# Altium PCB Board_v1_p1.PcbDoc
Units mm, origin at the board's own origin, x right, y up, seen from the top; angles counter-clockwise.
Board outline 33 x 33 mm, 4 copper layers (Top Layer, Layer 1, Layer 2, Bottom Layer), stack 0.904 mm thick; 35 components, 41 nets, 168 pads, 37 vias.
Unrouted connection lines stored in the file: 2.
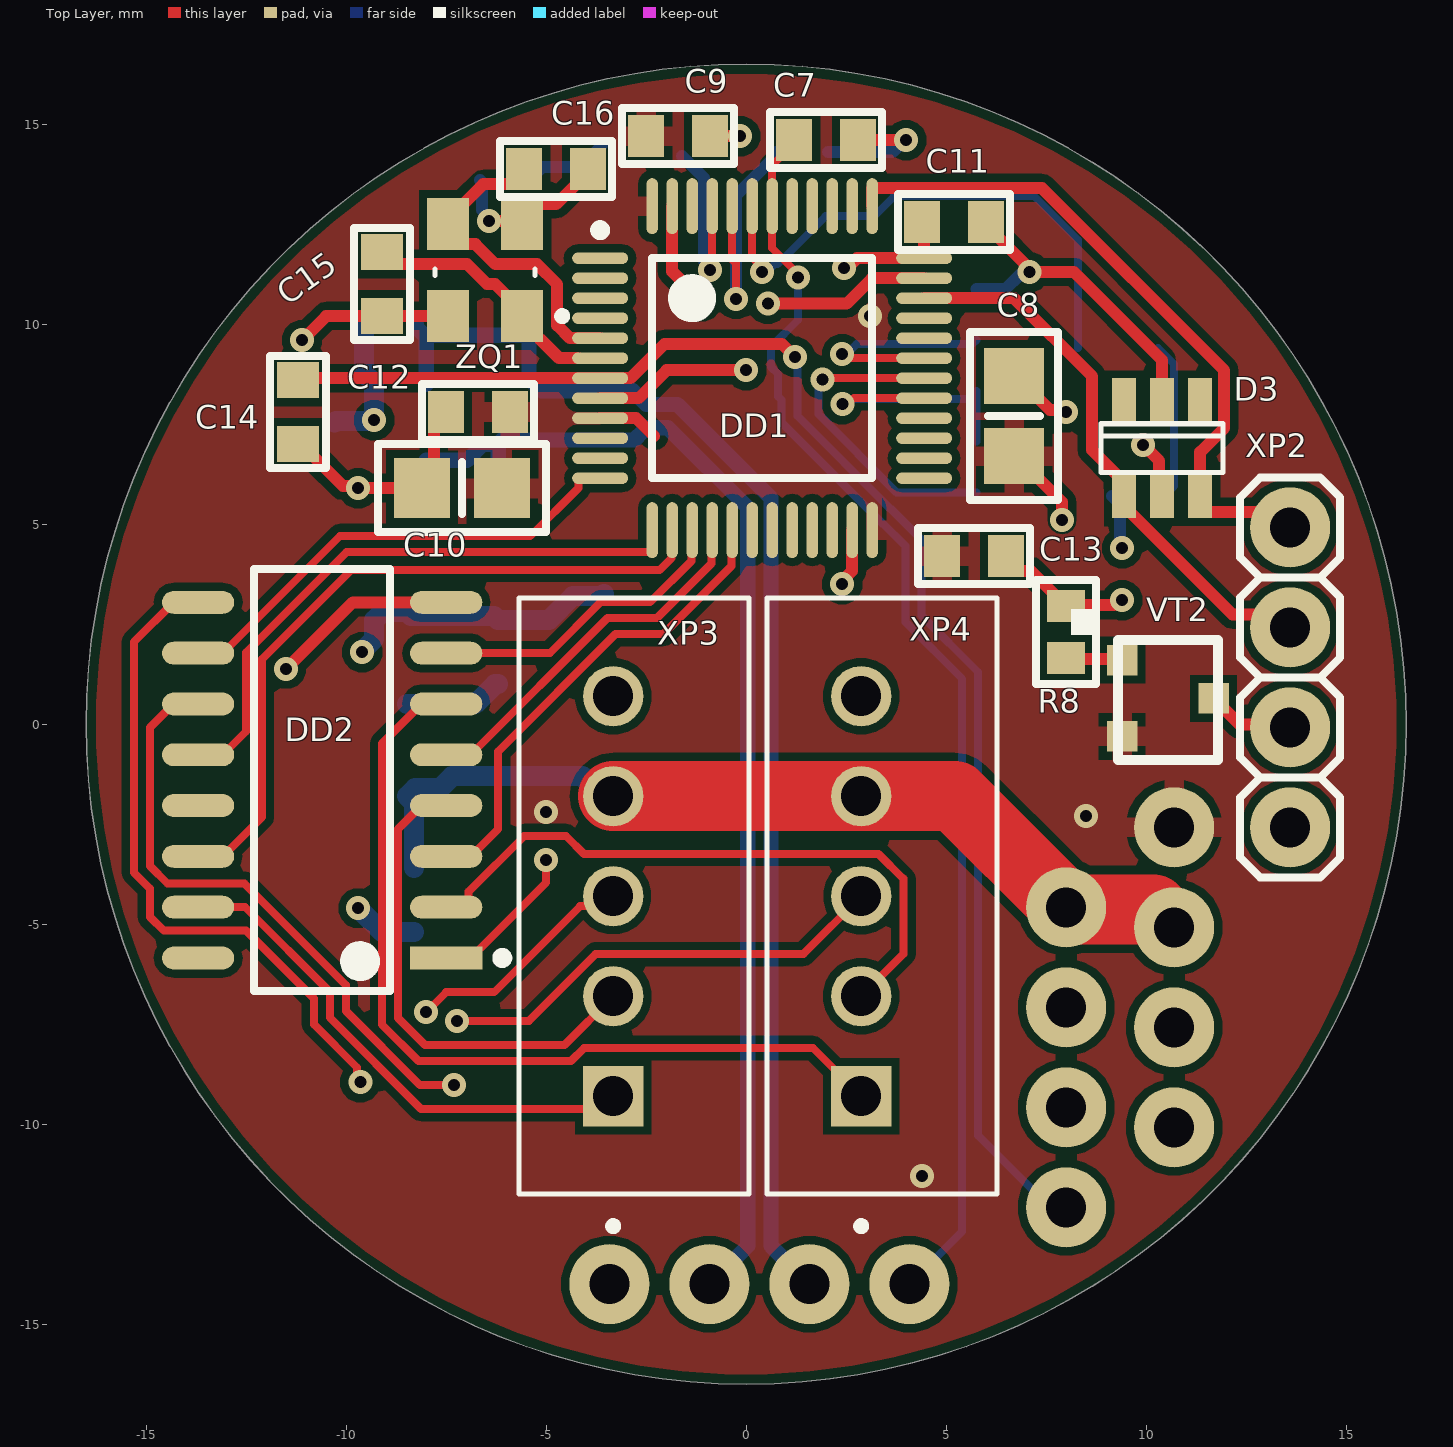
[diagram p0: Top Layer view]
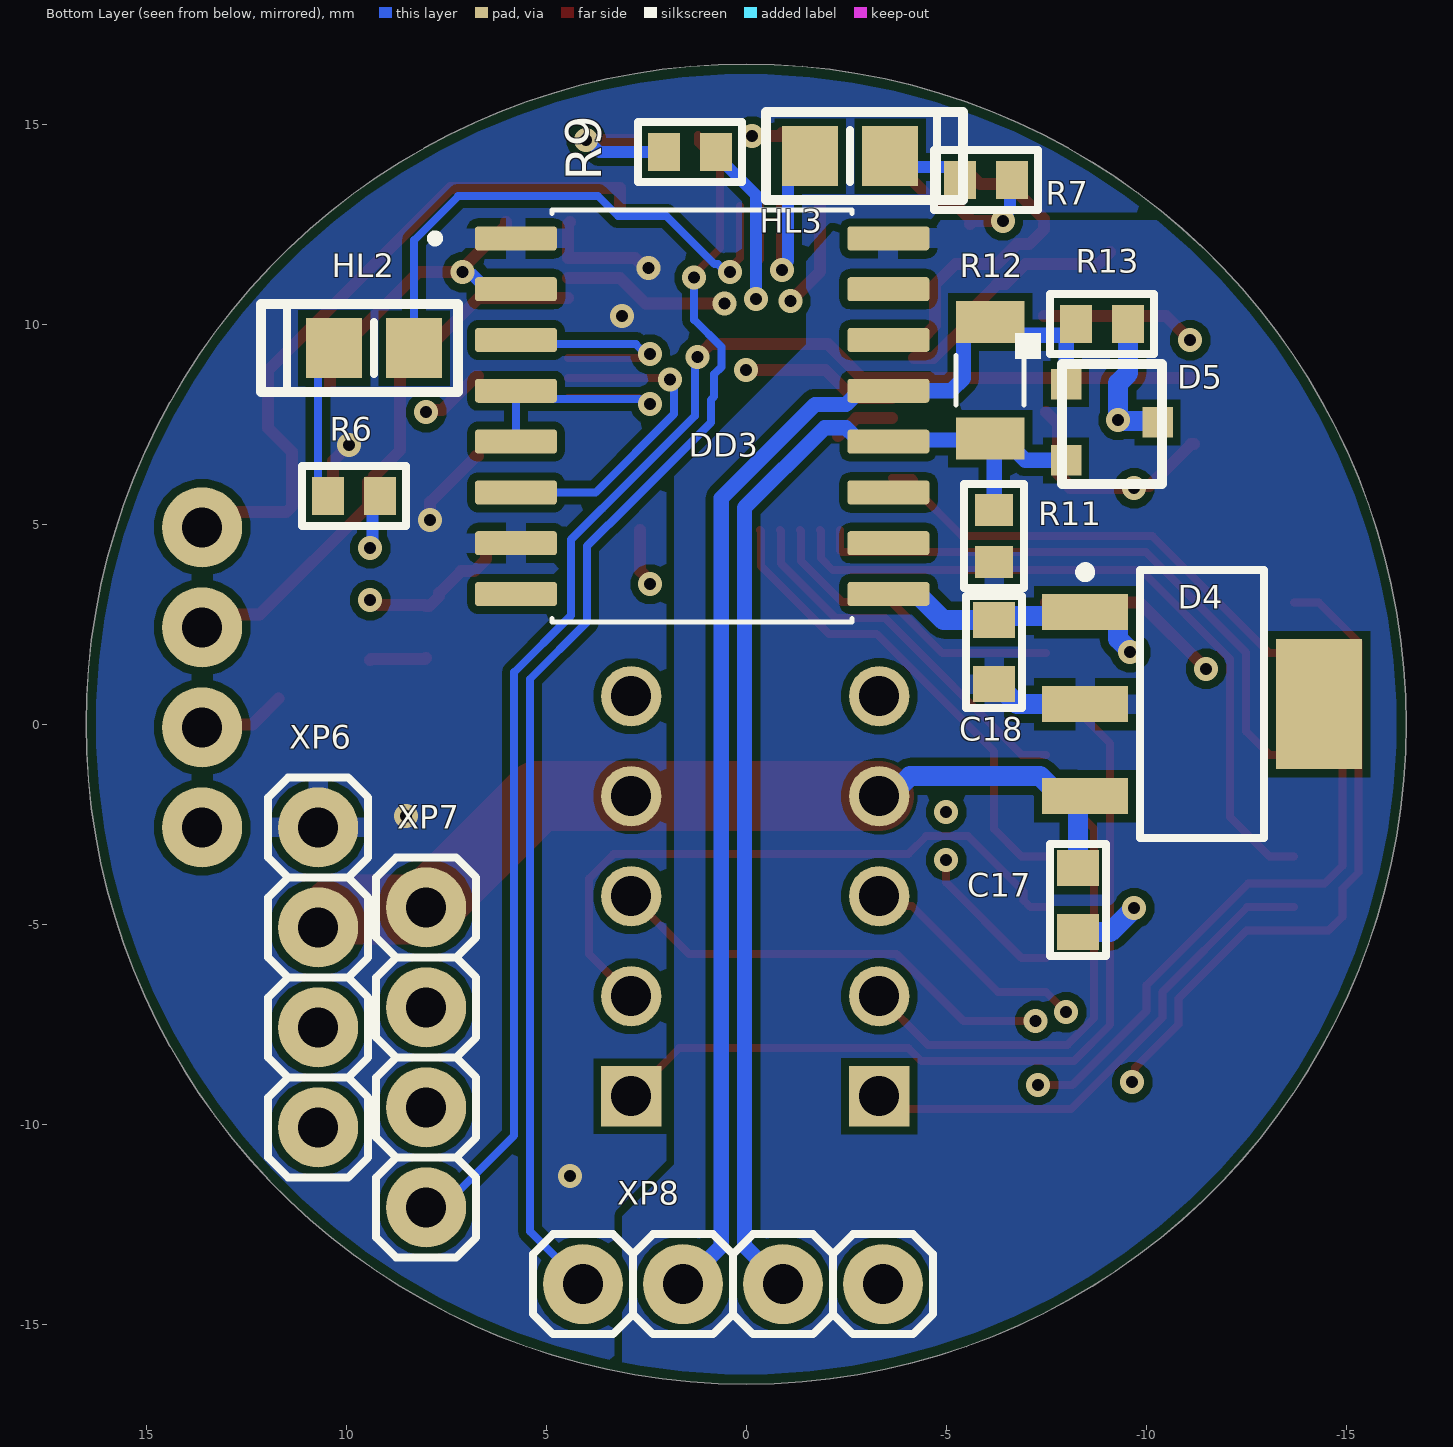
[diagram p1: Bottom Layer view, seen from below]
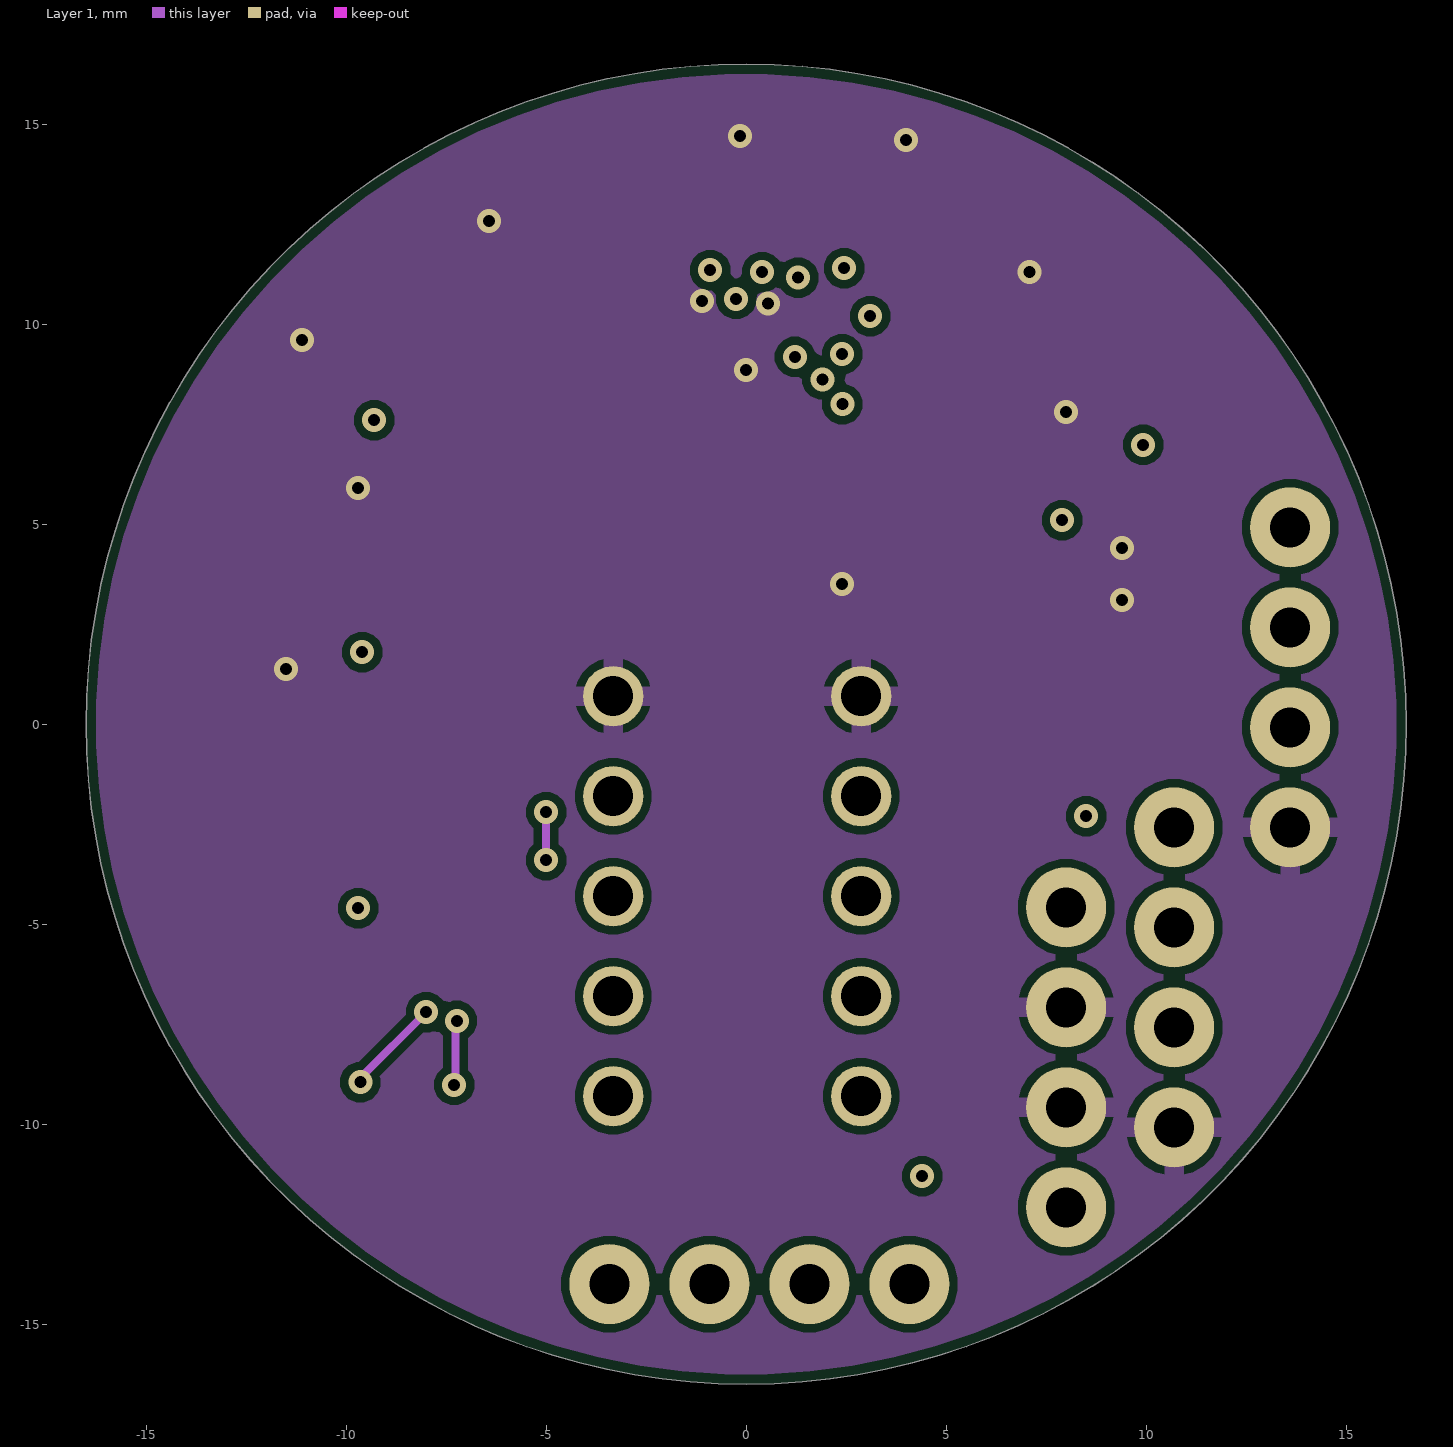
[diagram p2: Layer 1]
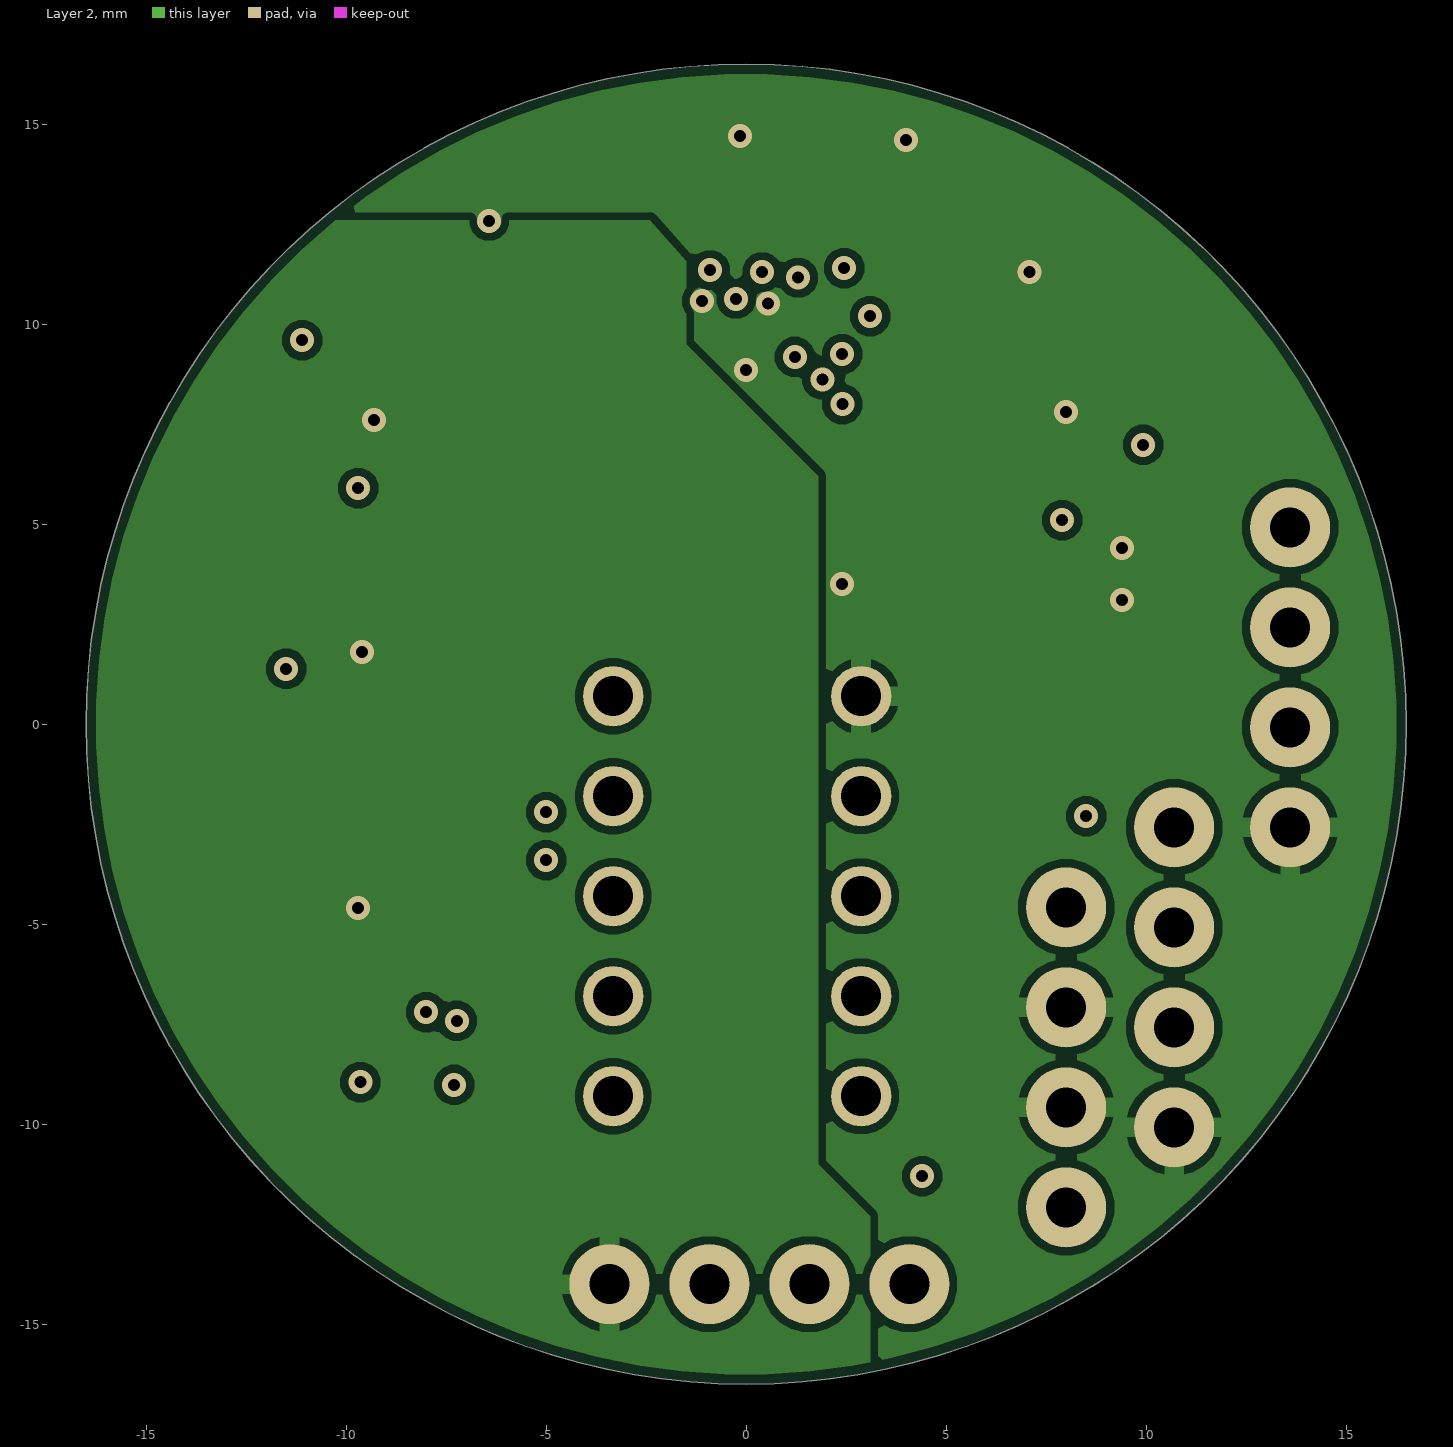
[diagram p3: Layer 2]

## Layer stack, top to bottom
Top Solder: solder mask 0.0254, SM-001, Dk 4
Top Layer: signal copper 0.035
Dielectric 2: prepreg 0.127, FR4, Dk 4.2
Layer 1: signal copper 0.035
Dielectric 1: core 0.51, FR4, Dk 4.6
Layer 2: signal copper 0.035
Dielectric 3: prepreg 0.127, FR4, Dk 4.2
Bottom Layer: signal copper 0.035
Bottom Solder: solder mask 0.0254, SM-001, Dk 4

## Board outline
0,-16.501 cw(c0,0) -16.501,0 cw(c0,0) 0,16.501 cw(c0,0) 16.501,0 cw(c0,0)

## Design rules (kind name [scope] priority, off if disabled: settings)
AcuteAngle [All] p1: minimum=3.50000000000000E+0001 checktracksonly=FALSE
BoardOutlineClearance "BoardOutlineClearance 1" [All] p1: gap=0.25 ignorepadtopadclearanceinfootprint=FALSE except(0: Arc-SplitContinuation Track-SplitContinuation SMDPad-SplitContinuation THPad-SplitContinuation Via-SplitContinuation Fill-SplitContinuation Poly-SplitContinuation Region-SplitContinuation Text-SplitContinuation) // Milling
BoardOutlineClearance "BoardOutlineClearance 2" [All] p2: gap=0.4 ignorepadtopadclearanceinfootprint=FALSE except(0: Arc-SplitContinuation Track-SplitContinuation SMDPad-SplitContinuation THPad-SplitContinuation Via-SplitContinuation Fill-SplitContinuation Poly-SplitContinuation Region-SplitContinuation Text-SplitContinuation) // V-Cut
Clearance "Clearance 3 Oz" [All] p1 off: gap=0.35 ignorepadtopadclearanceinfootprint=FALSE except(0.25: Arc-Hole Track-Hole SMDPad-Hole THPad-Hole Via-Hole Fill-Hole Poly-Hole Region-Hole Text-Hole)
Clearance "Clearance 2 Oz" [All] p2 off: gap=0.3 ignorepadtopadclearanceinfootprint=FALSE except(0.25: Arc-Hole Track-Hole SMDPad-Hole THPad-Hole Via-Hole Fill-Hole Poly-Hole Region-Hole Text-Hole)
Clearance "Clearance-1 1 Oz" [All] p3: gap=0.2 ignorepadtopadclearanceinfootprint=FALSE except(0.25: Arc-Hole Track-Hole SMDPad-Hole THPad-Hole Via-Hole Fill-Hole Poly-Hole Region-Hole Text-Hole) // Standart
Clearance "Clearance-2 1 Oz" [All] p4 off: gap=0.15 ignorepadtopadclearanceinfootprint=FALSE except(0.2: Arc-Fill Arc-Poly Track-Fill Track-Poly SMDPad-Fill SMDPad-Poly THPad-Fill THPad-Poly Via-Fill Via-Poly Fill-Fill Fill-Poly Poly-Poly; 0.25: Arc-Hole Track-Hole SMDPad-Hole THPad-Hole Via-Hole Fill-Hole Poly-Hole Region-Hole Text-Hole) // Advance
Clearance "Clearance-1 1/2 Oz" [All] p5 off: gap=0.125 ignorepadtopadclearanceinfootprint=FALSE except(0.2: Arc-Fill Arc-Poly Track-Fill Track-Poly SMDPad-SMDPad SMDPad-Fill SMDPad-Poly THPad-Fill THPad-Poly Via-Fill Via-Poly Fill-Fill Fill-Poly Poly-Poly Poly-Region Poly-Text; 0.25: Arc-Hole Track-Hole SMDPad-Hole THPad-Hole Via-Hole Fill-Hole Poly-Hole Region-Hole Text-Hole) // Standart
Clearance "Clearance-2 1/2 Oz" [All] p6 off: gap=0.1 ignorepadtopadclearanceinfootprint=FALSE except(0.15: Arc-Fill Arc-Poly Track-Fill Track-Poly SMDPad-SMDPad SMDPad-Fill SMDPad-Poly THPad-Fill THPad-Poly Via-Fill Via-Poly Fill-Fill Fill-Poly Poly-Poly Poly-Region Poly-Text; 0.25: Arc-Hole Track-Hole SMDPad-Hole THPad-Hole Via-Hole Fill-Hole Poly-Hole Region-Hole Text-Hole) // Advance
DiffPairsRouting "DiffPairsRouting 1 Oz" [All] p1: maxlimit=0.25 minlimit=0.2 mostfreqgap=0.2 toplayer_minwidth=0.3 toplayer_maxwidth=0.4 toplayer_prefwidth=0.4 midlayer1_minwidth=0.3 midlayer1_maxwidth=0.4 midlayer1_prefwidth=0.4 midlayer2_minwidth=0.3 midlayer2_maxwidth=0.4 midlayer2_prefwidth=0.4 bottomlayer_minwidth=0.3 bottomlayer_maxwidth=0.4 bottomlayer_prefwidth=0.4 maxuncoupledlength=12.7
DiffPairsRouting "DiffPairsRouting 1/2 Oz" [All] p2 off: maxlimit=0.254 minlimit=0.1 mostfreqgap=0.254 toplayer_minwidth=0.1 toplayer_maxwidth=0.381 toplayer_prefwidth=0.381 midlayer1_minwidth=0.1 midlayer1_maxwidth=0.381 midlayer1_prefwidth=0.381 midlayer2_minwidth=0.1 midlayer2_maxwidth=0.381 midlayer2_prefwidth=0.381 bottomlayer_minwidth=0.1 bottomlayer_maxwidth=0.381 bottomlayer_prefwidth=0.381 maxuncoupledlength=12.7
HoleSize "Minimum HoleSize" [IsPad] p1: absolutevalues=TRUE maxlimit=5.9 minlimit=0.6 maxpercent=80.000 minpercent=20.000
HoleSize "Minimum HoleSize VIA 1" [IsVia] p2: absolutevalues=TRUE maxlimit=5.9 minlimit=0.3 maxpercent=80.000 minpercent=20.000 // Standart
HoleSize "Minimum HoleSize VIA 2" [IsVia] p3: absolutevalues=TRUE maxlimit=5.9 minlimit=0.2 maxpercent=80.000 minpercent=20.000 // Advance
HoleToHoleClearance Hole2HoleClearance [All] p1: gap=0.25 allowstackedmicrovias=FALSE
MinimumAnnularRing "Minimum AR VIA Standart" [IsVia] p1: minimumring=0.15
MinimumAnnularRing "Minimum AR PAD Standart" [IsPAD] p2: minimumring=0.2
MinimumAnnularRing "Minimum AR VIA Advance" [IsVia] p3: minimumring=0.1
MinimumAnnularRing "Minimum AR PAD Advance" [IsPAD] p4: minimumring=0.15
MinimumSolderMaskSliver "SolderMask Bridge Standart" [All] p1: minsoldermaskwidth=0.15 // All Masks
MinimumSolderMaskSliver "SolderMask Bridge Advance" [All] p2: minsoldermaskwidth=0.1 // Mask LDI
PlaneClearance "PlaneClearance 3 Oz" [All] p1: clearance=0.35
PlaneClearance "PlaneClearance 2 Oz" [All] p2: clearance=0.3
PlaneClearance "PlaneClearance 1 Oz" [All] p3: clearance=0.2
PlaneClearance "PlaneClearance-1 1/2 Oz" [All] p4: clearance=0.2 // Standart
PlaneClearance "PlaneClearance-2 1/2 Oz" [All] p5: clearance=0.15 // Advance
PlaneConnect "TermalConnect 3 Oz" [All] p1: planeconnectstyle=Relief reliefexpansion=0.2 reliefentries=4 reliefconductorwidth=0.35 reliefairgap=0.35 // Standart
PlaneConnect "TermalConnect 2 Oz" [All] p2: planeconnectstyle=Relief reliefexpansion=0.2 reliefentries=4 reliefconductorwidth=0.3 reliefairgap=0.3 // Standart
PlaneConnect "TermalConnect-1 1 Oz" [All] p3: planeconnectstyle=Relief reliefexpansion=0.2 reliefentries=4 reliefconductorwidth=0.2 reliefairgap=0.2 // Standart
PlaneConnect "TermalConnect-2 1 Oz" [All] p4: pad.planeconnectstyle=Relief pad.reliefexpansion=0.15 pad.reliefentries=4 pad.reliefconductorwidth=0.2 pad.reliefairgap=0.2 via.planeconnectstyle=Direct via.reliefexpansion=0.15 via.reliefentries=4 via.reliefconductorwidth=0.15 via.reliefairgap=0.15 // Advance
PlaneConnect "TermalConnect-1 1/2 Oz" [All] p5: planeconnectstyle=Relief reliefexpansion=0.2 reliefentries=4 reliefconductorwidth=0.2 reliefairgap=0.2 // Standart
PlaneConnect "TermalConnect-2 1/2 Oz" [All] p6: pad.planeconnectstyle=Relief pad.reliefexpansion=0.15 pad.reliefentries=4 pad.reliefconductorwidth=0.15 pad.reliefairgap=0.15 via.planeconnectstyle=Direct via.reliefexpansion=0.15 via.reliefentries=4 via.reliefconductorwidth=0.15 via.reliefairgap=0.15 // Advance
PolygonConnect "PolygonConnect 3 Oz" [All] p1 off: thpad.connectstyle=Relief thpad.reliefconductorwidth=0.35 thpad.reliefentries=4 thpad.polygonreliefangle="90 Angle" thpad.airgapwidth=0.35 smdpad.connectstyle=Relief smdpad.reliefconductorwidth=0.35 smdpad.reliefentries=4 smdpad.polygonreliefangle="90 Angle" smdpad.airgapwidth=0.35 via.connectstyle=Direct via.reliefconductorwidth=0.254 via.reliefentries=4 via.polygonreliefangle="90 Angle" via.airgapwidth=0.254
PolygonConnect "PolygonConnect 2 Oz" [All] p2 off: thpad.connectstyle=Relief thpad.reliefconductorwidth=0.3 thpad.reliefentries=4 thpad.polygonreliefangle="90 Angle" thpad.airgapwidth=0.3 smdpad.connectstyle=Relief smdpad.reliefconductorwidth=0.3 smdpad.reliefentries=4 smdpad.polygonreliefangle="90 Angle" smdpad.airgapwidth=0.3 via.connectstyle=Direct via.reliefconductorwidth=0.254 via.reliefentries=4 via.polygonreliefangle="90 Angle" via.airgapwidth=0.254
PolygonConnect "PolygonConnect-1 1 Oz" [All] p3: thpad.connectstyle=Relief thpad.reliefconductorwidth=0.5 thpad.reliefentries=4 thpad.polygonreliefangle="90 Angle" thpad.airgapwidth=0.2 smdpad.connectstyle=Relief smdpad.reliefconductorwidth=0.5 smdpad.reliefentries=4 smdpad.polygonreliefangle="90 Angle" smdpad.airgapwidth=0.2 via.connectstyle=Direct via.reliefconductorwidth=0.254 via.reliefentries=4 via.polygonreliefangle="90 Angle" via.airgapwidth=0.254 // Standart
PolygonConnect "PolygonConnect-2 1 Oz" [All] p4 off: thpad.connectstyle=Relief thpad.reliefconductorwidth=0.15 thpad.reliefentries=4 thpad.polygonreliefangle="90 Angle" thpad.airgapwidth=0.15 smdpad.connectstyle=Relief smdpad.reliefconductorwidth=0.15 smdpad.reliefentries=4 smdpad.polygonreliefangle="90 Angle" smdpad.airgapwidth=0.15 via.connectstyle=Direct via.reliefconductorwidth=0.254 via.reliefentries=4 via.polygonreliefangle="90 Angle" via.airgapwidth=0.254 // Advance
PolygonConnect "PolygonConnect-1 1/2 Oz" [All] p5 off: thpad.connectstyle=Relief thpad.reliefconductorwidth=0.15 thpad.reliefentries=4 thpad.polygonreliefangle="90 Angle" thpad.airgapwidth=0.2 smdpad.connectstyle=Relief smdpad.reliefconductorwidth=0.2 smdpad.reliefentries=4 smdpad.polygonreliefangle="90 Angle" smdpad.airgapwidth=0.2 via.connectstyle=Direct via.reliefconductorwidth=0.254 via.reliefentries=4 via.polygonreliefangle="90 Angle" via.airgapwidth=0.254 // Standart
PolygonConnect "PolygonConnect-2 1/2 Oz" [All] p6 off: thpad.connectstyle=Relief thpad.reliefconductorwidth=0.125 thpad.reliefentries=4 thpad.polygonreliefangle="90 Angle" thpad.airgapwidth=0.15 smdpad.connectstyle=Relief smdpad.reliefconductorwidth=0.125 smdpad.reliefentries=4 smdpad.polygonreliefangle="90 Angle" smdpad.airgapwidth=0.15 via.connectstyle=Direct via.reliefconductorwidth=0.254 via.reliefentries=4 via.polygonreliefangle="90 Angle" via.airgapwidth=0.254 // Advance
RoutingCorners [All] p1 off: cornerstyle=45-Degree minsetback=2.54 maxsetback=2.54
RoutingVias [All] p1: holewidth=0.3 width=0.6 viastyle="Through Hole" minholewidth=0.3 minwidth=0.6 maxholewidth=5.9 maxwidth=6.4
SilkToSilkClearance Silk2SilkClearance [All] p1 off: silktosilkclearance=0.15
SilkToSolderMaskClearance Silk2SolderMaskClearance [IsPad] p1 off: minsilkscreentomaskgap=0.15 clearancetoexposedcopper=TRUE
SolderMaskExpansion SolderMaskExpansion-1 [All] p1: expansion=0.05 istentingtop=FALSE // Standart
SolderMaskExpansion "SolderMaskExpansion LDI" [All] p2: expansion=0.025 istentingtop=FALSE // Advance
SupplyNets "Schematic Supply Nets_4" [InNet('GND_SIGNAL')] p1: voltage=0.000
SupplyNets "Schematic Supply Nets_3" [InNet('GND')] p2: voltage=0.000
SupplyNets "Schematic Supply Nets_2" [InNet('+3,3 В')] p3: voltage=0.000
SupplyNets "Schematic Supply Nets_1" [InNet('+5 В')] p4: voltage=0.000
SupplyNets "Schematic Supply Nets" [InNet('+12 В')] p5: voltage=0.000
UnRoutedNet [All] p1: checkbadconnections=TRUE
Width "Width 3 Oz" [All] p1 off: maxlimit=10 minlimit=0.35 preferedwidth=0.4 checkconnectedcopper=TRUE
Width "Width 2 Oz" [All] p2 off: maxlimit=10 minlimit=0.3 preferedwidth=0.35 minimp=50.000000 maximp=50.000000 favimp=50.000000 checkconnectedcopper=TRUE
Width "Width 1 Oz" [All] p3: maxlimit=10 minlimit=0.15 preferedwidth=0.2 checkconnectedcopper=TRUE
Width "Width 1/2 Oz" [All] p4 off: maxlimit=10 minlimit=0.1 preferedwidth=0.125 checkconnectedcopper=TRUE
20 further rules are at their usual default settings.

## Classes and differential pairs
component class RS485: C17 C18 D4 D5 DD3 R11 R12 R13
component class MC_stm32: C7 C8 C9 C10 C11 C12 C13 C14 C15 C16 D3 DD1 DD2 HL2 HL3 R6 R7 R8 R9 VT2 XP2 XP3 XP4 ZQ1 С7 С8 С14
differential pair RS485: +RS485_P -RS485_N

## Components (designator, comment, footprint, x,y, rotation, side; value= is the part's Value field where it differs from the comment)
C7 "Capacitor" 0603C 2,14.6 r0 top value="0,1 мк"
C8 "Capacitor" 0805C 6.6,7.6 r90 top value="4,7 мк"
C9 "Capacitor" 0603C -1.7,14.7 r0 top value="0,1 мк"
C10 "Capacitor" 0805C -7,5.8 r180 top value="1 мк"
C11 "Capacitor" 0603C 5.2,12.55 r180 top value="0,1 мк"
C12 "Capacitor" 0603C -6.7,7.8 r180 top value="0,01 мк"
C13 "Capacitor" 0603C 5.7,4.2 r180 top value="0,1 мк"
C14 "Capacitor" 0603C -11.2,7.8 r270 top value="0,1 мк"
C15 "Capacitor" 0603C -9.1,11 r270 top value="12 п"
C16 "Capacitor" 0603C -4.75,13.876 r0 top value="12 п"
C17 "Capacitor" 0603C -8.3,-4.4 r270 bottom value="0,1 мк"
C18 "Capacitor" 0603C -6.2,1.8 r90 bottom value="10 мк"
D3 "USBLC6-4" SOT23-6 10.4,6.9 r180 top
D4 "LD1117S50CTR" SOT223 -11.4,0.5 r180 bottom
D5 "PSM712" SOT23-3 -8,8.5 r180 bottom
DD1 "STM32F103C8T6" LQFP48 0.4,8.9 r0 top
DD2 "CD4050B" SOP-16 -10.6,-1.4 r180 top
DD3 "ADM2483BRWZ" SOIC-16W 1.1,7.7 r180 bottom
HL2 "=Value" 0805D 9.2,9.3 r0 bottom
HL3 "=Value" 0805D -2.5,14.3 r180 bottom
R6 "Resistor" 0603R 9.8,5.7 r180 bottom value=200
R7 "Resistor" 0603R -6,13.6 r0 bottom value="1 к"
R8 "Resistor" 0603R 8,2.3 r270 top value="10 к"
R9 "Resistor" 0603R 1.4,14.3 r180 bottom value="10 к"
R11 "Resistor" 0603R -6.2,4.7 r270 bottom value=680
R12 "Resistor" 1206R -6.1,8.6 r270 bottom value=120
R13 "Resistor" 0603R -8.9,10 r0 bottom value=680
VT2 "AO3401A" SOT23-3 9.4,1.6 r0 top
XP2 "PLS4" PLS4 13.6,5 r0 top
XP3 "CWF-5" CWF-5 -2.8,-4.3 r270 top
XP4 "CWF-5" CWF-5 3.4,-4.3 r270 top
XP6 "Comment" PLS4 10.7,-2.5 r180 bottom locked
XP7 "Comment" PLS4 8,-4.5 r180 bottom locked
XP8 "Comment" PLS4 -3.5,-14 r270 bottom locked
ZQ1 "XTAL_GND" QSMD3.2x2.5 -5.6,10.2 r180 top value="8 МГц"

## Footprints (in the part's own frame and the unit in brackets; to place one, negate y for a bottom-side part, rotate by r counter-clockwise, add the part's x,y. Pads: shape width x height; smd on the part's side, far side on the other; paste and mask are expansions set on the pad)
0603C [mm] "Chip Resistor, 2-Leads, Body 1,40x0,80mm, IPC Medium Density"
  rect 0.9x1.05 smd: 1(-0.8,0) 2(0.8,0)
  silkscreen extent -1.4,-0.7 1.4,0.7, body extent -0.85,-0.45 0.85,0.45, height 0.9
0603R [mm] "Chip Resistor, 2-Leads, Body 1.60x0.85mm, IPC Medium Density"
  rect 0.8x0.95 smd: 1(-0.65,0) 2(0.65,0)
  silkscreen extent -1.3,-0.75 1.3,0.75, body extent -0.87,-0.47 0.88,0.48, height 0.9
0805C [mm]
  rect 1.4x1.5 smd: 1(-0.9,-0.1) 2(1.1,-0.1)
  silkscreen extent -2,-1.2 2.2,1, body extent -0.95,-0.8 1.15,0.55, height 1.38
0805D [mm]
  rect 1.4x1.5 smd: 1(-0.9,-0.1) 2(1.1,-0.1)
  silkscreen extent -2,-1.2 2.93,1, body extent -0.97,-0.8 1.17,0.6, height 0.7
1206R [mm]
  rect 1.05x1.72 smd: 1(-1.46,0) 2(1.46,0)
  silkscreen extent -0.62,-0.85 0.62,0.85, body extent -1.55,-0.77 1.55,0.78, height 0.65
CWF-5 [mm] "B5B-XH-A"
  rect 1.508x1.508 / inner round 1.508 / far side rect 1.508x1.508 hole 1: 1(5,-0.525)
  round 1.508 hole 1: 2(2.5,-0.525) 3(0,-0.525) 4(-2.5,-0.525) 5(-5,-0.525)
  silkscreen extent -7.45,-2.88 8.35,2.88, body extent -7.45,-2.88 7.45,2.88, height 7
LQFP48 [mm] "TSQFP, 48-Leads, Body 7,00x7,00mm, Pitch 0,50mm, IPC Medium Density"
  oval 1.4x0.29 smd: 1(-4.05,2.75) 2(-4.05,2.25) 3(-4.05,1.75) 4(-4.05,1.25) 5(-4.05,0.75) 6(-4.05,0.25) 7(-4.05,-0.25) 8(-4.05,-0.75) 9(-4.05,-1.25) 10(-4.05,-1.75) 11(-4.05,-2.25) 12(-4.05,-2.75)
  oval 0.29x1.4 smd paste+0 mask+0.09: 13(-2.75,-4.05) 14(-2.25,-4.05) 15(-1.75,-4.05) 16(-1.25,-4.05) 17(-0.75,-4.05) 18(-0.25,-4.05) 19(0.25,-4.05) 20(0.75,-4.05) 21(1.25,-4.05) 22(1.75,-4.05) 23(2.25,-4.05) 24(2.75,-4.05) 37(2.75,4.05) 38(2.25,4.05) 39(1.75,4.05) 40(1.25,4.05) 41(0.75,4.05) 42(0.25,4.05) 43(-0.25,4.05) 44(-0.75,4.05) 45(-1.25,4.05) 46(-1.75,4.05) 47(-2.25,4.05) 48(-2.75,4.05)
  oval 1.4x0.29 smd paste+0 mask+0.09: 25(4.05,-2.75) 26(4.05,-2.25) 27(4.05,-1.75) 28(4.05,-1.25) 29(4.05,-0.75) 30(4.05,-0.25) 31(4.05,0.25) 32(4.05,0.75) 33(4.05,1.25) 34(4.05,1.75) 35(4.05,2.25) 36(4.05,2.75)
  silkscreen extent -4.17,-2.75 2.75,3.57, body extent -4.5,-4.47 4.5,4.52, height 1.48
PLS4 [mm]
  round 2 hole 1: 1(0,-0.08) 2(0,-2.58) 3(0,-5.08) 4(0,-7.58)
  silkscreen extent -1.25,-8.83 1.25,1.17, body extent -1.27,-8.93 1.27,1.19, height 8.44
QSMD3.2x2.5 [mm] "Кварцевый резонатор"
  rect 1.05x1.3 smd: 1(0,0) 2(1.85,-2.3) 3(0,-2.3) 3(1.85,0)
  silkscreen extent -1.1,-1.18 2.18,0.1, body extent -0.32,-2.75 2.18,0.45, height 0.8
SOIC-16W [mm]
  rrect25% 2.05x0.6 smd: 1(-4.655,4.445) 2(-4.655,3.175) 3(-4.655,1.905) 4(-4.655,0.635) 5(-4.655,-0.635) 6(-4.655,-1.905) 7(-4.655,-3.175) 8(-4.655,-4.445) 9(4.655,-4.445) 10(4.655,-3.175) 11(4.655,-1.905) 12(4.655,-0.635) 13(4.655,0.635) 14(4.655,1.905) 15(4.655,3.175) 16(4.655,4.445)
  silkscreen extent -6.78,-5.15 3.75,5.15, body extent -5.16,-5.15 5.16,5.15, height 2.65
SOP-16 [mil]
  rect 71x22.52 smd paste+0 mask+0: 1(-122.06,175)
  rrect100% 71x22.52 smd paste+0 mask+0: 2(-122.06,125) 3(-122.06,75) 4(-122.06,25) 5(-122.06,-25) 6(-122.06,-75) 7(-122.06,-125) 8(-122.06,-175) 9(122.06,-175) 10(122.06,-125) 11(122.06,-75) 12(122.06,-25) 13(122.06,25) 14(122.06,75) 15(122.06,125) 16(122.06,175)
  silkscreen extent -182,-208 67,208, body extent -167,-218 167,218, height 10
SOT23-3 [mil]
  rect 30x30 smd: 1(0,0) 2(0,-75) 3(90,-37.5)
  silkscreen extent -50,-98 94,50, body extent -4,-97 94,21, height 41
SOT23-6 [mm]
  rect 0.6x1.2 smd: 1(-0.95,-1.15) 2(0,-1.15) 3(0.95,-1.15) 4(0.95,1.15) 5(0,1.15) 6(-0.95,1.15)
  silkscreen extent -1.52,-0.61 1.52,0.61, body extent -1.46,-1.4 1.46,1.4, height 1.4
SOT223 [mm] "SOT223, ld1117"
  rect 2.15x0.9 smd: 1(-2.925,2.3) 2(-2.925,0) 3(-2.925,-2.3)
  rect 2.15x3.25 smd: 4(2.925,0)
  silkscreen extent -3.05,-3.35 1.55,3.42, body extent -3.56,-3.3 3.51,3.2, height 1.6

## Part data
C7 C9 C11 C12 C13 C14 C15 C16 C17 C18: library part "0,1 мк", "Конденсатор", Part Number=Capacitor
C8: library part "0,1 мк", "Конденсатор керамический smd 4.7 мкФ X7R 10% 16В 0805,", Part Number=Capacitor
C10: library part "0,1 мк", "Конденсатор керамический smd 1 мкФ X7R 16В 10% 0805, GRM21BR71C105K", Part Number=Capacitor
D3: "Сборка защитных диодов для USB", ComponentLink1Description=Shop, ComponentLink1URL=https://www.chipdip.ru/product0/8001780508, Part Number=USBLC6-4
D4: "Линейный стабилизатор напряжения 5 вольта. Максимальный ток - 0,8 ампер, гарантированное падение напряжения 1,3 вольта"
D5: "Защитный диод для линии RS-485", Interface=RS-485, Part Number=PSM712
DD1: "Микроконтроллер", Case=корпус, Manufacturer="ST Microelectronics", Value1=MCU, Datasheet=http://www.st.com/content/ccc/resource/technical/document/datasheet/33/d4/6f/1d/df/0b/4c/6d/CD00161566.pdf/files/CD00161566.pdf/jcr:content/translations/en.CD00161566.pdf, Notice="48 пиновая версия STM32F103", Part Number=STM32F103C8T6, Rate=-0,3...4,0В, Shop="магазин с самой дешевой ценой"
DD2: "Шесть буферных элементов", Part Number=CD4050B
DD3: "Приёмопередатчик RS-485 с гальванической развязкой"
HL2: library part LED, "Светодиод зеленый SMD 0805", Case=-, Color=Зеленый, Datasheet=-, Manufacturer=-, Notice=-, Rate=-, Shop=-
HL3: library part LED, "Светодиод зеленый SMD 0805", Case=-, Color=Красный, Datasheet=-, Manufacturer=-, Notice=-, Rate=-, Shop=-
R6 R7: "0.1Вт 0603 100 Ом, 1%, Чип резистор (SMD)"
R8: "0603 10 кОм, 1%, Чип резистор (SMD)"
R9: "0603 100 кОм, 1%, Чип резистор (SMD)"
R11 R12 R13: "Резистор", Part Number=Resistor
VT2: "P-канальный MOSFET", Part Number=AO3401A
XP2: Manufacturer=Connfly, Value1=SWCLOCK, Value2=SWDIO, Value3=+3,3_in, Value4=GND, Datasheet=https://lib.chipdip.ru/227/DOC000227157.pdf, Notice="Вилка штырьевая 4 пина, шаг 2,54мм", Rate="500В AC 1min", Shop=https://www.chipdip.ru/product/pls-4
XP3: "Разъем на плату, 3 А, 250 В, шаг 2.5 мм; CWF-5 (CONNFLY) B5B-XH-A (JST)", Manufacturer=JST, Value1=SERVO1_DIR, Value2=SERVO1_PWM, Value3=SERVO1_FB, Value4="+12 В", Value5=GND, Datasheet=https://cdn.promelec.ru/upload/items/2020/05/25/ePH-JST_.pdf, Notice="Вилка штырьевая 5 пинов, шаг 2мм", Rate="100В, 2А", Shop=https://www.promelec.ru/product/362481/
XP4: "Разъем на плату, 3 А, 250 В, шаг 2.5 мм; CWF-5 (CONNFLY) B5B-XH-A (JST)", Manufacturer=JST, Value1=SERVO2_DIR, Value2=SERVO2_PWM, Value3=SERVO2_FB, Value4="+12 В", Value5=GND, Datasheet=https://cdn.promelec.ru/upload/items/2020/05/25/ePH-JST_.pdf, Notice="Вилка штырьевая 5 пинов, шаг 2мм", Rate="100В, 2А", Shop=https://www.promelec.ru/product/362481/
ZQ1: "WTL3M85421FO, Резонатор кварцевый 8МГц, 10PPM при 25°C, 20PPM при -40°С+85°C, 400Ом, 12пФ", Part Number=XTAL_GND

## Via types
v1: diameter 0.6, hole 0.3, Top Layer to Bottom Layer, 37 vias

## Nets (pads, with @x,y where several pads share a name; then routed paths per layer and width w, separated by ;. In a path a pad name is that pad's centre, name@x,y a point inside that pad or via, vN(x,y) a via of type N, cw(c..) or ccw(c..) an arc to the next point about the centre after c; other vN are vias at no path point)
"+3,3 В": C8.1 C9.1 C10.1 C11.2 C12.1 C13.2 D3.5 DD1.9 DD1.24 DD1.36 DD1.48 DD2.1 DD3.1 DD3.7 VT2.2 XP6.1 | length 12.9
  Top Layer w0.2: DD2.1 -6.884,-5.845 -5,-3.961 v1(-5,-3.4)
  Top Layer w0.3: DD1.9 -2.75,7.65 -2.3,7.2 ; v1(2.448,11.402) 2.529,11.402 2.777,11.65 DD1.36 4.45,12.5 C11.2 ; C8.1 6.75,6.7 7.9,5.55 v1(7.9,5.1) ; v1(9.925,6.982) 10.325,6.581 10.325,6.125 D3.5@10.4,6.05
  Layer 1 w0.2: v1(-5,-3.4) v1(-5,-2.2)
  other v1: 4.4,-11.3 8.5,-2.3 3.1,10.2
"+5 В": C18.1 D4.2 DD3.16 R11.2 | length 2.5
  Bottom Layer w0.5: D4.2 -6.775,0.5 -6.275,1 C18.1
"+12 В": C17.1 D4.3 XP3.4 XP4.4 XP6.2 XP6.3 XP7.1 | length 22.8
  Top Layer w1.75: XP3.4 5.22,-1.8 8.048,-4.628 10.18,-4.628 10.632,-5.08 XP6.2
  Bottom Layer w0.5: C17.1 -8.3,-1.975 D4.3 -8.275,-1.6 -7.65,-1.6 -7.35,-1.3 -4.098,-1.3 -3.598,-1.8 XP3.4
BUTTON: C7.1 DD1.42 XP8.4 | length 32
  Top Layer w0.2: C7.1@1.2,14.725 1.2,14.525 0.65,13.975 0.65,11.899 1.3,11.249 v1(1.3,11.162)
  Bottom Layer w0.2: v1(1.3,11.162) 1.3,10.108 0.62,9.428 0.62,8.931 0.8,8.751 0.8,8.191 0.882,8.109 0.882,7.544 3.431,4.995 3.439,4.995 3.98,4.454 3.98,2.554 5.4,1.134 5.4,-12.68 XP8.4
GND: C7.2 C8.2 C9.2 C10.2 C11.1 C12.2 C13.1 C14.2 C15.2 C16.2 D3.2 DD1.8 DD1.23 DD1.35 DD1.47 DD2.8 DD3.2 R6.2 R7.1 R8.1 R9.1 XP2.4 XP3.5 XP4.5 XP6.4 XP7.2 XP7.3 ZQ1.3 | length 49.4
  Top Layer w0.3: v1(-11.499,1.381) -9.835,3.045 DD2.8 ; C14.2 -11.125,7 -10.082,5.957 -9.757,5.957 v1(-9.7,5.9) C10.2 ; v1(-11.1,9.6) -10.5,10.2 ZQ1.3@-7.45,10.2 ; C10.2@-8.1,5.95 -7.8,6.25 -7.8,7.5 C12.2 ; v1(-6.425,12.581) -5.681,12.581 ZQ1.3@-5.6,12.5 ; ZQ1.3@-5.591,12.634 -5.225,13 -4.751,13 -4.1,13.651 C16.2@-4.1,14.1 ; DD1.8 -2.688,8.15 -1.988,8.85 v1(0,8.85) ; DD1.47 -1.85,11.317 v1(-1.109,10.576) ; C9.2@-0.9,14.775 C9.2 v1(-0.15,14.7) ; v1(0.54,10.512) 2.512,10.512 3.15,11.15 DD1.35 ; v1(2.4,3.5) 2.4,3.581 2.65,3.831 DD1.23 ; C7.2 v1(4,14.6) v1@4.081,14.6 ; C11.1 6,12.475 7.032,11.443 7.032,11.439 7.17,11.3 8.2,11.3 10.4,9.1 D3.2@10.4,8.35 ; C13.1 6.5,4.125 6.8,3.825 7.125,3.825 7.675,3.275 7.675,3.2 7.925,2.95 R8.1 8.025,2.975 9.194,2.975 9.319,3.1 v1(9.4,3.1) ; C8.2 6.75,8.7 7.593,7.857 7.943,7.857 v1(8,7.8)
  Bottom Layer w0.3: R7.1 -6.6,13.55 -6.6,12.856 ; R9.1 3.664,14.3 3.964,14.6 v1(4,14.6) ; DD3.2 6.48,10.875 6.848,11.243 7.032,11.243 v1(7.089,11.3) ; R6.2 9.343,5.507 9.343,4.457 v1(9.4,4.4)
GND_SIGNAL: C17.2 C18.2 D4.1 D5.3 DD3.9 R13.1 XP8.1 | length 12.3
  Bottom Layer w0.5: D5.3 -10.253,7.581 -9.319,7.581 v1(-9.3,7.6) -9.3,8.525 -9.55,8.775 R13.1 ; v1(-9.701,-4.6) -9.101,-5.2 C17.2 ; v1(-9.6,1.8) -9.6,1.827 -9.3,2.127 -9.3,2.6 -9.1,2.8 D4.1 -8.375,2.7 -6.3,2.7 C18.2 -4.935,2.6 -4.33,3.205 -3.605,3.205 DD3.9
LED_ERROR: DD1.45 HL3.1 | length 4.7
  Top Layer w0.2: v1@-0.9,11.4 -0.85,11.45 DD1.45
  Bottom Layer w0.3: HL3.1 -1.05,13.65 -1.05,11.579 -0.9,11.429 v1(-0.9,11.348)
LED_OK: DD1.43 HL2.1 | length 13.6
  Top Layer w0.2: DD1.43 0.15,11.658 0.4,11.408 v1(0.4,11.3)
  Bottom Layer w0.2: v1(0.4,11.3) 0.508,11.3 0.708,11.5 0.789,11.5 1.989,12.7 3.2,12.7 3.7,13.2 7.2,13.2 8.3,12.1 HL2.1
NetC3_1: 
NetC3_2: 
NetC14_1: C14.1 DD1.7 XP7.4 | length 37.4
  Top Layer w0.3: C14.1 -11.15,8.65 DD1.7 -3.645,8.655 -2.89,8.655 -2.045,9.5 0.9,9.5 v1(1.22,9.18)
  Bottom Layer w0.2: v1(1.22,9.18) 1.282,9.118 1.282,7.709 3.596,5.395 3.605,5.395 4.38,4.62 4.38,2.72 5.8,1.3 5.8,-10.28 XP7.4@8,-12.48
NetC15_1: C15.1 DD1.6 ZQ1.1 | length 6.1
  Top Layer w0.3: C15.1 -8.8,11.5 -6.977,11.5 -6.477,11 -6.275,11 -5.6,10.325 ZQ1.1 ; ZQ1.1@-5.663,10.138 -4.68,9.155 DD1.6@-4.2,9.155
NetC16_1: C16.1 DD1.5 ZQ1.2 | length 8.1
  Top Layer w0.3: ZQ1.2 -7.45,12.375 -7.075,12 -6.77,12 -6.27,11.5 -5.23,11.5 -4.725,10.995 -4.725,9.97 -4.41,9.655 -3.655,9.655 DD1.5 ; ZQ1.2@-7.45,12.625 -6.574,13.501 -5.85,13.501 -5.6,13.751 C16.1@-5.6,13.925
NetD1_8: 
NetDD1_29: DD1.29 DD3.4 DD3.5 | length 6.9
  Top Layer w0.2: v1(2.405,8) 2.541,8 2.691,8.15 DD1.29
  Bottom Layer w0.2: v1(2.405,8) 2.514,8 2.649,8.135 5.555,8.135 DD3.4 DD3.5
NetDD1_30: DD1.30 DD3.6 | length 8.2
  Top Layer w0.2: v1(1.903,8.623) 1.931,8.65 DD1.30
  Bottom Layer w0.2: v1(1.903,8.623) 1.827,8.546 1.827,8.427 1.805,8.405 1.805,7.751 3.762,5.795 DD3.6
NetDD1_31: DD1.31 DD3.3 | length 5.6
  Top Layer w0.2: v1(2.4,9.25) 2.508,9.25 2.608,9.15 DD1.31
  Bottom Layer w0.2: v1(2.4,9.25) 2.508,9.25 2.758,9.5 5.65,9.5 DD3.3
NetDD1_44: DD1.44 R9.2 | length 6.4
  Top Layer w0.2: DD1.44 -0.35,11.619 -0.251,11.52 v1(-0.251,10.632)
  Bottom Layer w0.3: v1(-0.251,10.632) -0.25,10.633 -0.25,13.225 0.75,14.225 R9.2
NetDD2_2: DD2.2 XP4.2 | length 16.1
  Top Layer w0.2: DD2.2 -7.111,-4.575 -6.939,-4.403 -6.939,-4.189 -5.55,-2.8 -4.5,-2.8 -4.054,-3.246 3.312,-3.246 3.929,-3.863 3.929,-5.746 XP4.2
NetDD2_4: DD2.4 XP3.2 | length 12.3
  Top Layer w0.2: DD2.4 -8.115,-2.035 -8.701,-2.621 -8.701,-7.347 -8.029,-8.02 -4.545,-8.02 XP3.2
NetDD2_6: DD2.6 XP4.1 | length 22
  Top Layer w0.2: DD2.6 -8.115,0.505 -9.101,-0.481 -9.101,-7.513 -8.194,-8.42 -4.377,-8.42 -4.057,-8.1 1.675,-8.1 XP4.1
NetDD2_9: DD2.9 XP3.3 | length 24.9
  Top Layer w0.2: DD2.9 -14.316,3.045 -15.302,2.059 -15.302,-3.713 -14.902,-4.113 -14.902,-4.818 -14.559,-5.161 -12.505,-5.161 -10.808,-6.858 -10.808,-7.503 -9.724,-8.588 -9.724,-8.871 v1(-9.647,-8.947) ; v1(-8,-7.2) -7.5,-6.7 -6.3,-6.7 -4.15,-4.55 -3.575,-4.55 XP3.3
  Layer 1 w0.2: v1(-9.647,-8.947) -9.647,-8.847 v1(-8,-7.2)
NetDD2_11: DD2.11 XP4.3 | length 28.2
  Top Layer w0.2: DD2.11 -14.316,0.505 -14.902,-0.081 -14.902,-0.522 -14.902,-1.008 -14.902,-1.792 -14.902,-2.427 -14.902,-3.062 -14.902,-3.548 -14.461,-3.989 -12.545,-3.989 -10.008,-6.526 -10.008,-7.172 -8.16,-9.02 v1(-7.3,-9.02) ; v1(-7.231,-7.42) -5.435,-7.42 -3.762,-5.746 1.429,-5.746 XP4.3
  Layer 1 w0.2: v1(-7.3,-9.02) -7.265,-8.985 -7.265,-7.454 v1(-7.231,-7.42)
NetDD2_15: DD2.15 XP3.1 | length 13
  Top Layer w0.2: DD2.15 -12.525,-4.575 -10.408,-6.692 -10.408,-7.338 -8.126,-9.62 -3.645,-9.62 XP3.1
NetHL1_2: 
NetHL2_2: HL2.2 R6.1 | length 4
  Bottom Layer w0.2: HL2.2 10.7,9 10.7,5.95 R6.1
NetHL3_2: HL3.2 R7.2 | length 2.2
  Bottom Layer w0.3: R7.2 -5.35,13.675 -5.1,13.925 -4.15,13.925 -3.6,14.475 HL3.2@-3.6,14.5
NetR4_1: 
NetR8_2: R8.2 VT2.1 | length 1.4
  Top Layer w0.3: R8.2 8.025,1.625 9.375,1.625 VT2.1
NetVT1_2: 
NetVT2_3: VT2.3 XP2.3 | length 2.2
  Top Layer w0.3: VT2.3 12.341,-0.008 13.528,-0.008 XP2.3
RS485_N: D5.1 DD3.13 R12.1 R13.2 XP8.3 | length 32.7
  Bottom Layer w0.381: R13.2 -8.25,9.925 -8,9.675 D5.1 ; R13.2@-8.04,9.725 -5.477,9.725 -5.454,9.749 -5.43,9.725 -5.43,8.646 -5.12,8.335 -2.83,8.335 -2.72,8.226 -2.72,8.214 -2.497,7.99 -1.718,7.99 0.62,5.652 0.62,-13.04 XP8.3
RS485_P: D5.2 DD3.12 R11.1 R12.2 XP8.2 | length 30.4
  Bottom Layer w0.381: D5.2 -6.98,6.595 -6.575,7 -6.2,7 R11.1@-6.2,5.45 ; R12.2@-6.112,7.103 -2.792,7.103 -2.72,7.174 -2.72,7.186 -2.497,7.41 -1.958,7.41 0.039,5.412 0.039,-13.04 XP8.2
SERVO1_DIR: DD1.14 DD2.14 | length 17.9
  Top Layer w0.2: DD2.14 -13.085,-3.305 -12.099,-2.319 -12.099,1.63 -9.878,3.85 -2.166,3.85 -1.867,4.148 -1.867,4.833 DD1.14
SERVO1_FB: DD1.12 DD2.10 | length 12
  Top Layer w0.2: DD2.10 -13.085,1.775 -10.16,4.7 -5.4,4.7 -4.195,5.905 -4.195,6.108 -4.153,6.15 DD1.12
SERVO1_PWM: DD1.16 DD2.5 | length 9.5
  Top Layer w0.2: DD2.5 -6.884,-0.765 -3.468,2.651 -2.233,2.651 -0.867,4.017 -0.867,4.833 DD1.16
SERVO2_DIR: DD1.15 DD2.7 | length 7.9
  Top Layer w0.2: DD2.7 -4.91,1.775 -3.633,3.051 -2.399,3.051 -1.367,4.083 -1.367,4.833 DD1.15
SERVO2_FB: DD1.13 DD2.12 | length 15.1
  Top Layer w0.2: DD2.12 -13.085,-0.765 -12.499,-0.179 -12.499,1.795 -9.994,4.3 -2.392,4.3 -2.35,4.342 DD1.13
SERVO2_PWM: DD1.17 DD2.3 | length 12.2
  Top Layer w0.2: DD2.3 -6.884,-3.305 -6.2,-2.621 -6.2,-0.684 -3.264,2.251 -2.067,2.251 -0.367,3.951 -0.367,4.833 DD1.17
SWCLOCK: D3.6 DD1.37 XP2.1 | length 17.2
  Top Layer w0.3: DD1.37 3.15,13.395 3.155,13.4 7.395,13.4 11.95,8.845 11.95,7.4 11.35,6.8 11.35,5.45 11.5,5.3 12.76,5.3 13.14,4.92 XP2.1
SWDIO: D3.4 DD1.34 XP2.2 | length 14.1
  Top Layer w0.3: DD1.34 6.695,10.65 8.65,8.695 8.65,6.85 9.3,6.2 D3.4@9.3,5.9 ; D3.4@9.45,6.05 9.45,5.45 12.155,2.745 13.275,2.745 XP2.2
pads on no net: D3.1 D3.3 D4.4 DD1.1 DD1.2 DD1.3 DD1.4 DD1.10 DD1.11 DD1.18 DD1.19 DD1.20 DD1.21 DD1.22 DD1.25 DD1.26 DD1.27 DD1.28 DD1.32 DD1.33 DD1.38 DD1.39 DD1.40 DD1.41 DD1.46 DD2.13 DD2.16 DD3.8 DD3.10 DD3.11 DD3.14 DD3.15

## Polygon pours and split planes (outlines as drawn)
"+3,3 В" on Bottom Layer "+3,3_В_L04_P010" (solid, pour order 10): 0,-16.501 cw(c0,0) -16.501,0 cw(c0,0) 0,16.501 cw(c0,0) 16.501,0 cw(c0,0)
"+5 В" on Bottom Layer "+5_В_L04_P002" (solid, pour order 2): -8.4,12.6 -2.407,12.6 -1.5,11.572 -1.5,9.5 1.8,6.2 1.8,-11 3.1,-12.3 3.1,-17.184 -8.644,-16.021 -16.553,-5.367 -16.553,6.765 -11.9,12.6
GND on Layer 2 "GND_L03_P013" (solid, pour order 13): 0,-16.501 cw(c0,0) -16.501,0 cw(c0,0) 0,16.501 cw(c0,0) 16.501,0 cw(c0,0)
GND_SIGNAL on Layer 2 "GND_SIGNAL_L04_P013" (solid, pour order 11): -8.4,12.6 -2.407,12.6 -1.5,11.572 -1.5,9.5 1.8,6.2 1.8,-11 3.1,-12.3 3.1,-17.184 -8.644,-16.021 -16.553,-5.367 -16.553,6.765 -11.9,12.6
GND on Layer 1 "GND_L02_P005" (solid, pour order 5): 0,-16.501 cw(c0,0) -16.501,0 cw(c0,0) 0,16.501 cw(c0,0) 16.501,0 cw(c0,0)
"+3,3 В" on Top Layer "+3,3_В_L01_P004" (solid, pour order 4): 0,-16.501 cw(c0,0) -16.501,0 cw(c0,0) 0,16.501 cw(c0,0) 16.501,0 cw(c0,0)